# Altium PCB DIP2040.PcbDoc
Units mm, origin at the board's own origin, x right, y up, seen from the top; angles counter-clockwise.
Board outline 17.78 x 50.8 mm, 4 copper layers (Top Layer, Layer 1, Layer 2, Bottom Layer), stack 0.603 mm thick; 55 components, 62 nets, 253 pads, 64 vias.
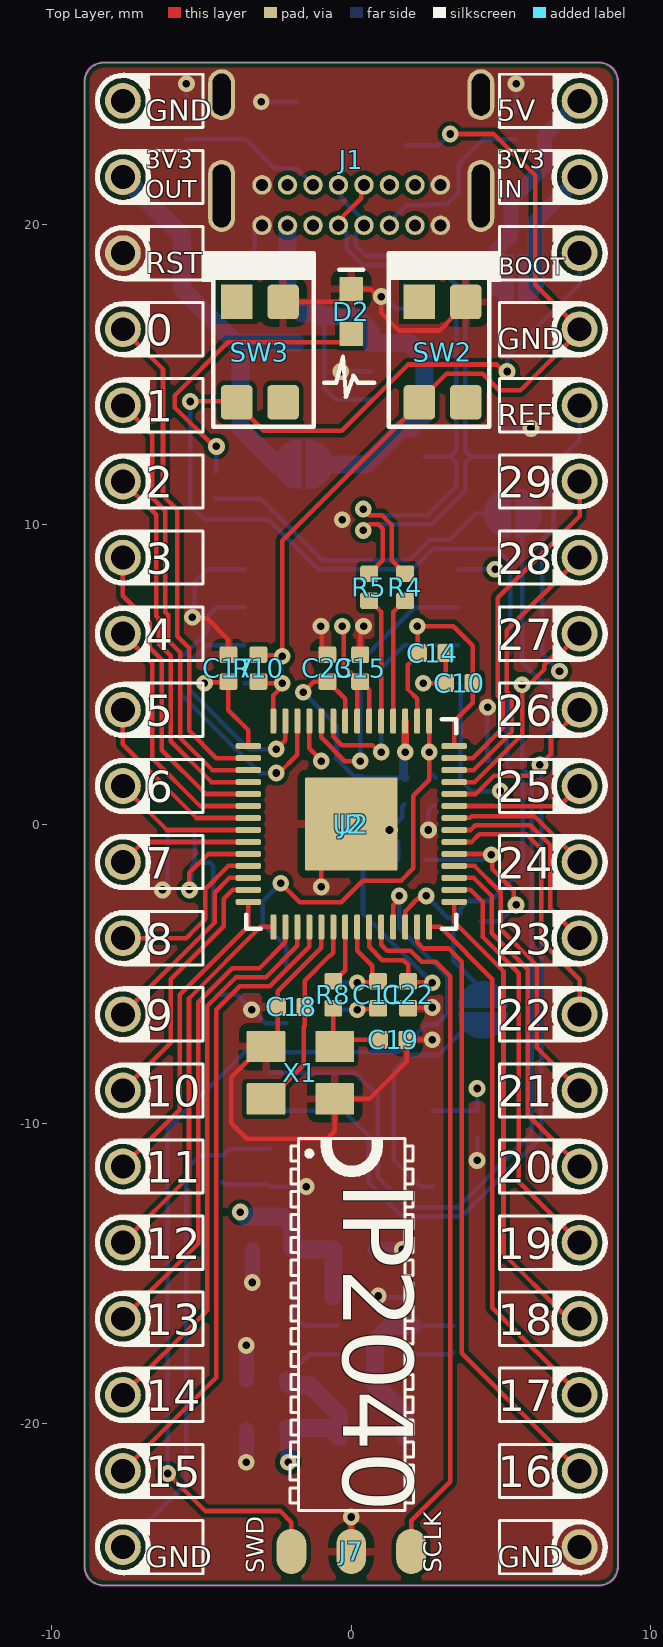
[diagram p0: Top Layer view]
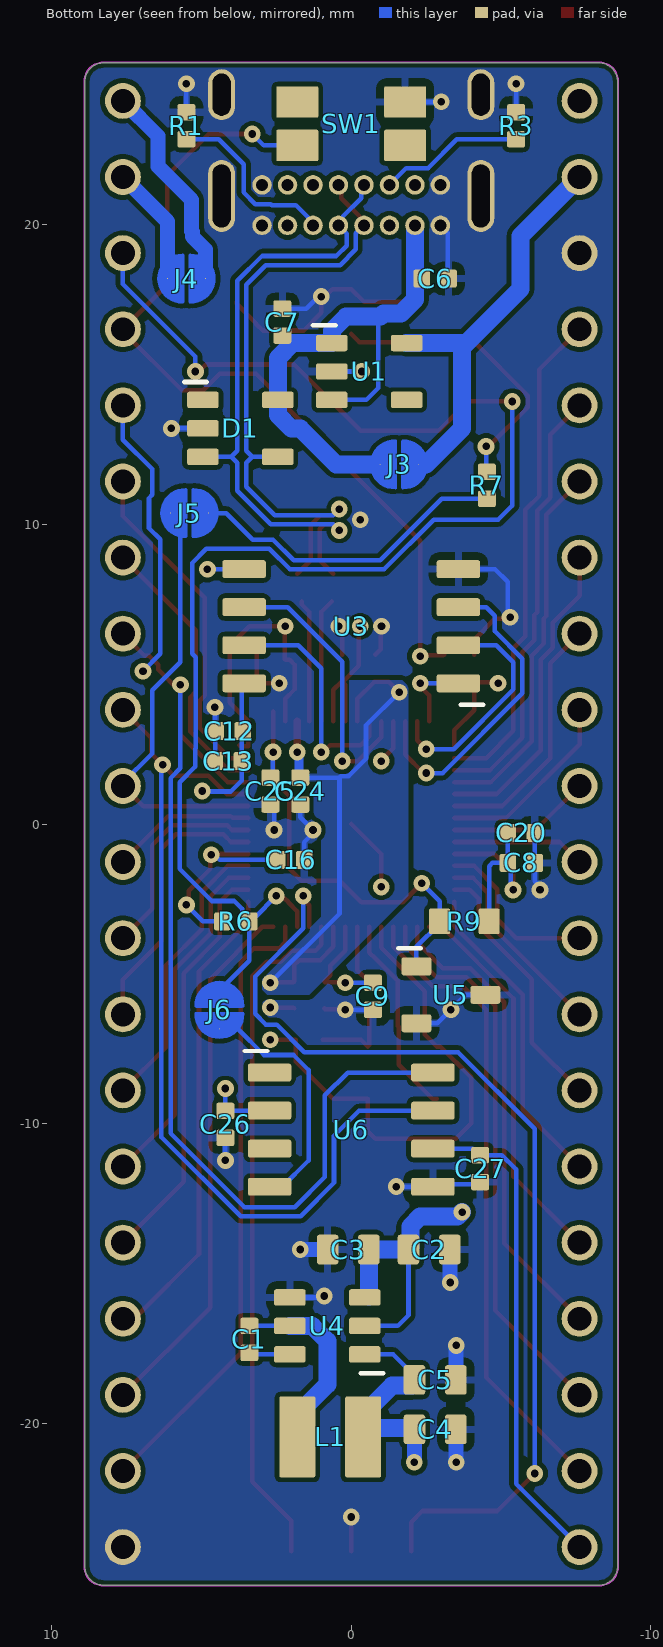
[diagram p1: Bottom Layer view, seen from below]
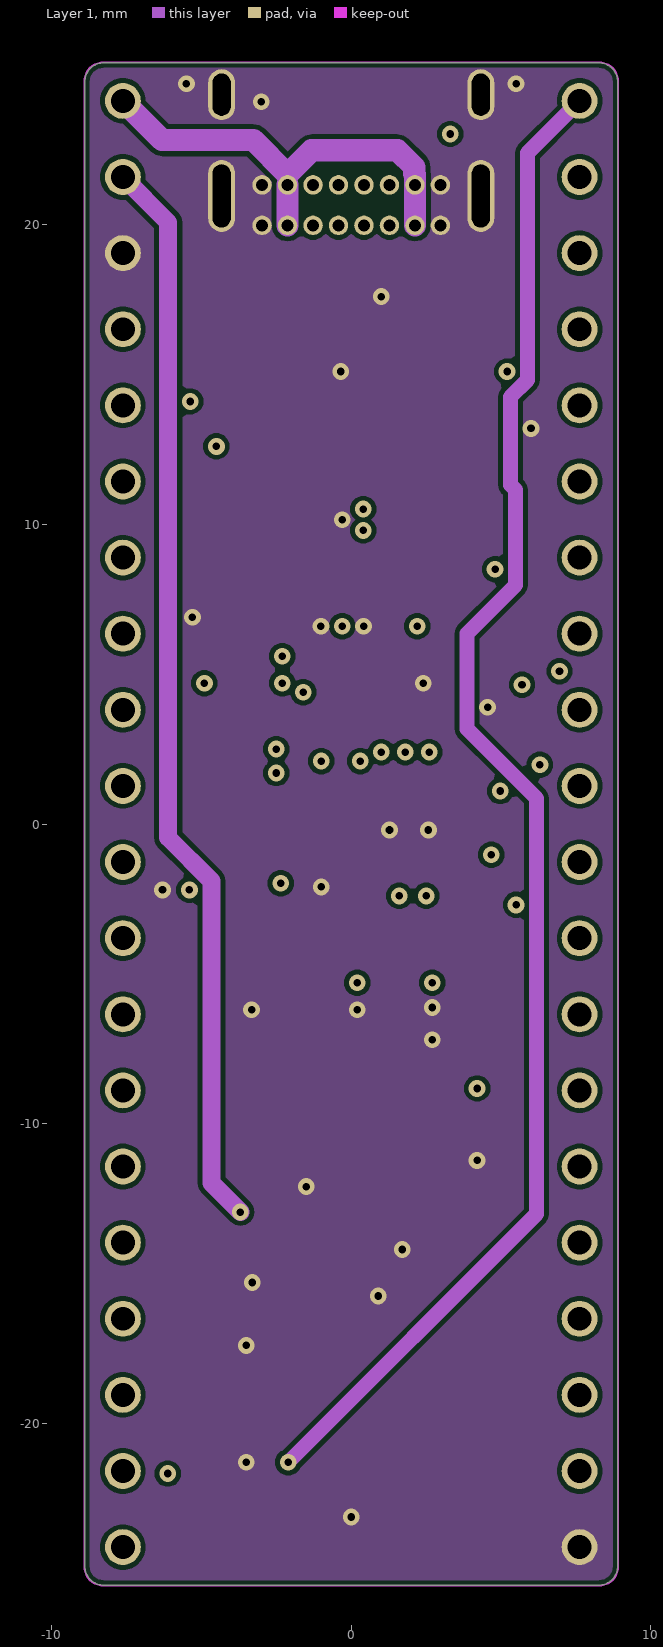
[diagram p2: Layer 1]
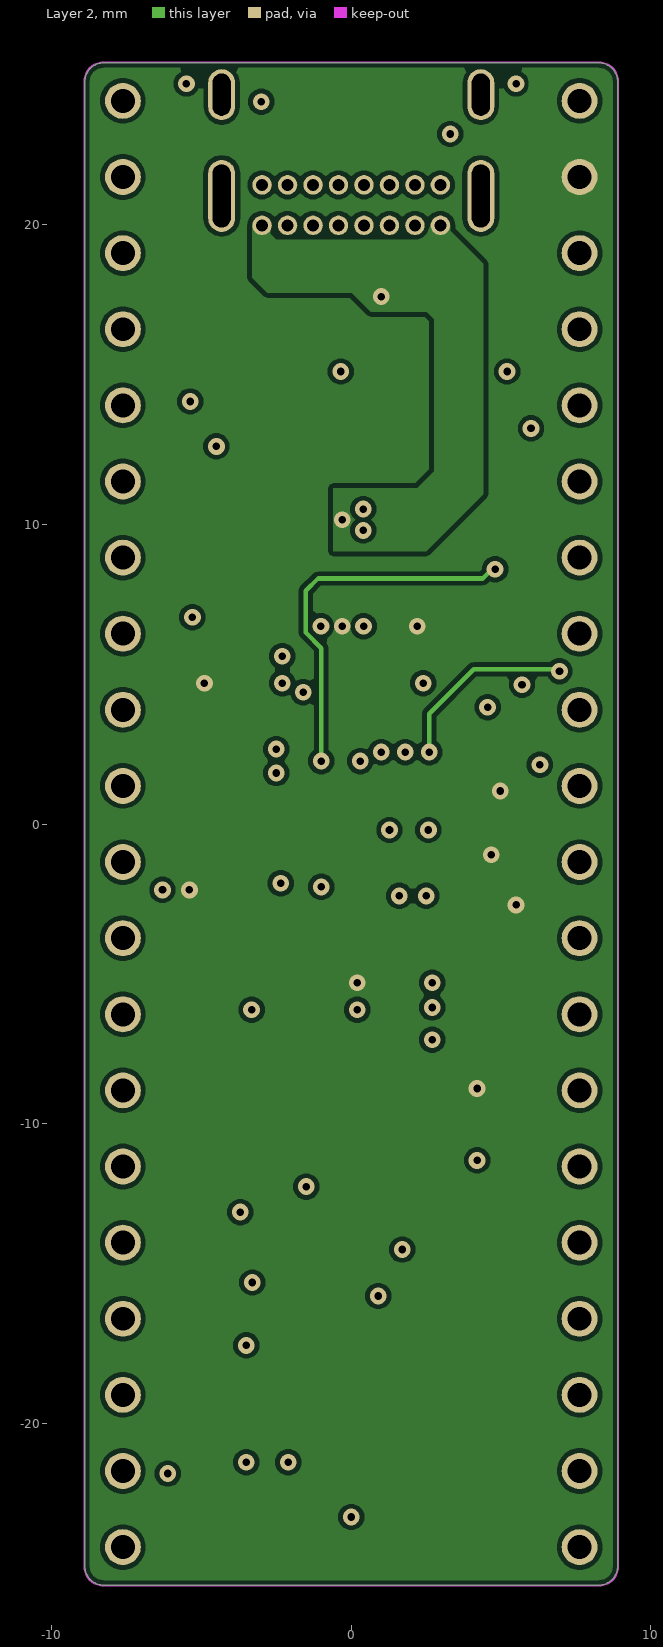
[diagram p3: Layer 2]
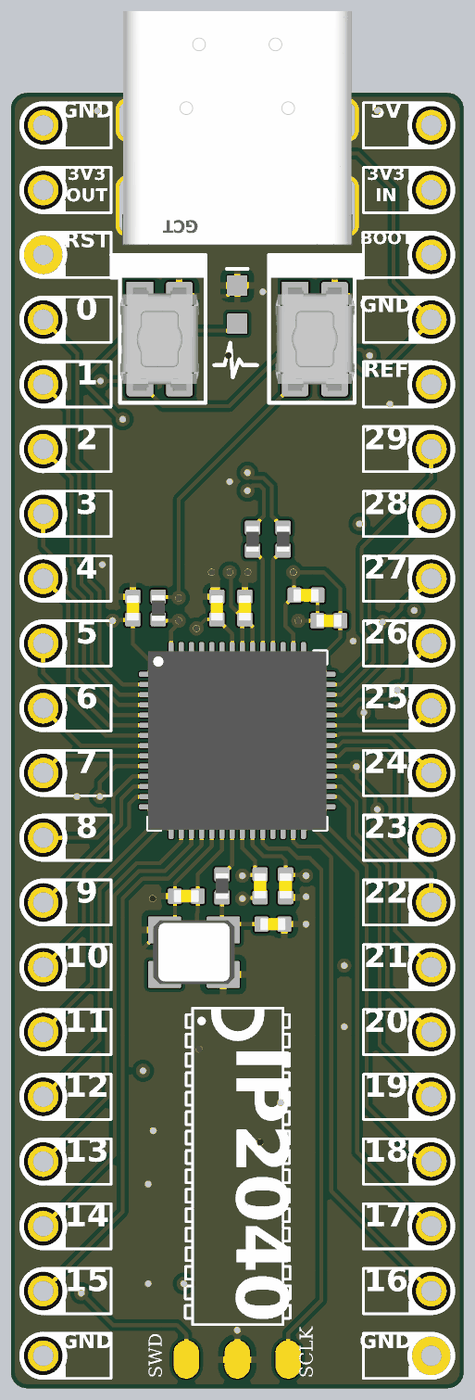
[diagram p4: 3D render of the assembled board from above, using the file's embedded part models]
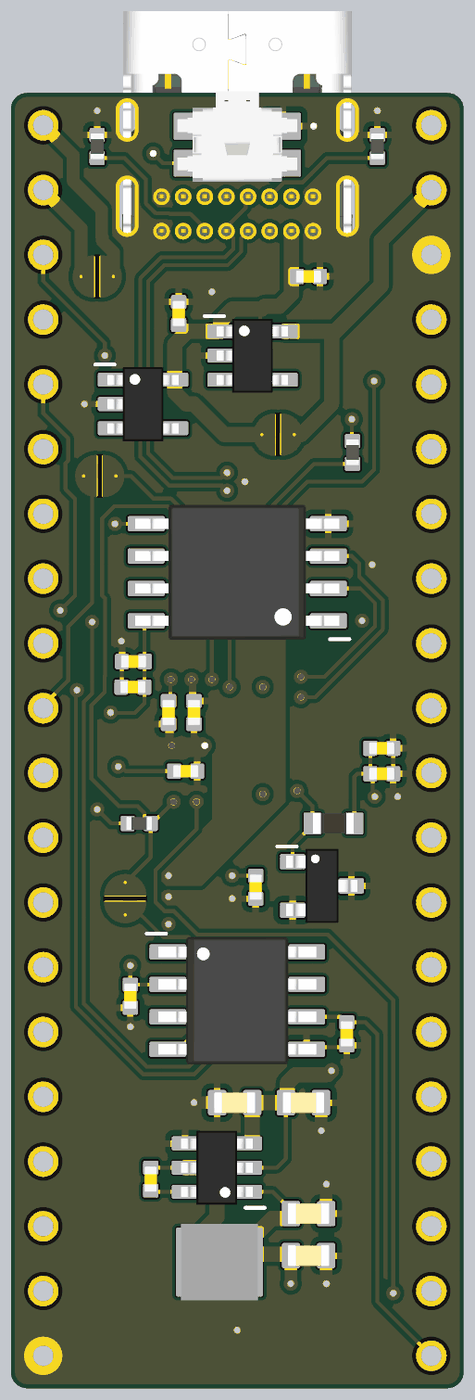
[diagram p5: 3D render of the assembled board from below, using the file's embedded part models]

## Layer stack, top to bottom
Top Solder: solder mask 0.0102, Solder Resist, Dk 3.5
Top Layer: signal copper 0.0356
Dielectric 2: prepreg 0.0711, PP-006, Dk 4.1
Layer 1: signal copper 0.035
Dielectric 1: dielectric 0.32, FR-4, Dk 4.8
Layer 2: signal copper 0.035
Dielectric 3: prepreg 0.0711, PP-006, Dk 4.1
Bottom Layer: signal copper 0.0356
Bottom Solder: solder mask 0.0102, Solder Resist, Dk 3.5

## Board outline
-8.89,-24.765 ccw(c-8.255,-24.765) -8.255,-25.4 8.255,-25.4 ccw(c8.255,-24.765) 8.89,-24.765 8.89,24.765 ccw(c8.255,24.765) 8.255,25.4 -8.255,25.4 ccw(c-8.255,24.765) -8.89,24.765

## Design rules (kind name [scope] priority, off if disabled: settings)
Clearance [All] p1: gap=0.152 ignorepadtopadclearanceinfootprint=FALSE
ComponentClearance [NOT InComponent('J2') vs NOT InComponent('J2')] p1: gap=0.254 collisioncheckmode=3 verticalgap=0.254 showdistances=FALSE
MinimumSolderMaskSliver [All] p1: minsoldermaskwidth=0.1
PolygonConnect [All] p1: thpad.connectstyle=Direct thpad.reliefconductorwidth=0.254 thpad.reliefentries=4 thpad.polygonreliefangle="90 Angle" thpad.airgapwidth=0.254 smdpad.connectstyle=Relief smdpad.reliefconductorwidth=0.254 smdpad.reliefentries=4 smdpad.polygonreliefangle="90 Angle" smdpad.airgapwidth=0.254 via.connectstyle=Direct via.reliefconductorwidth=0.254 via.reliefentries=4 via.polygonreliefangle="90 Angle" via.airgapwidth=0.254
RoutingVias [All] p1: holewidth=0.305 width=0.66 viastyle="Through Hole" minholewidth=0.254 minwidth=0.559 maxholewidth=2.54 maxwidth=3.81
SilkToSilkClearance [All] p1: silktosilkclearance=0.15
SilkToSolderMaskClearance [IsPad] p1: minsilkscreentomaskgap=0.05 clearancetoexposedcopper=TRUE
SolderMaskExpansion [All] p1: expansion=0.102 istentingtop=FALSE
SupplyNets "Schematic Supply Nets_7" [InNet('VBUS')] p1: voltage=0.000
SupplyNets "Schematic Supply Nets_6" [InNet('VSYS')] p2: voltage=0.000
SupplyNets "Schematic Supply Nets_5" [InNet('P3V3')] p3: voltage=0.000
SupplyNets "Schematic Supply Nets_3" [InNet('GND')] p4: voltage=0.000
SupplyNets "Schematic Supply Nets_2" [InNet('P3V3OUT')] p5: voltage=0.000
SupplyNets "Schematic Supply Nets_1" [InNet('VREF')] p6: voltage=0.000
Width [All] p1: maxlimit=1 minlimit=0.152 preferedwidth=0.152
26 further rules are at their usual default settings.

## Components (designator, comment, footprint, x,y, rotation, side; value= is the part's Value field where it differs from the comment)
C1 "CAP0402" CAPC0402 3.4,-17.2 r270 bottom
C2 "CAP0603" CAPC0603 -2.6,-14.2 r180 bottom
C3 "CAP0603" CAPC0603 0.1,-14.2 r0 bottom
C4 "CAP0603" CAPC0603 -2.8,-20.2 r180 bottom
C5 "CAP0603" CAPC0603 -2.8,-18.55 r180 bottom
C6 "CAP0402" CAPC0402 -2.8,18.2 r180 bottom
C7 "CAP0402" CAPC0402 2.3,16.75 r90 bottom
C8 "CAP0402" CAPC0402 -5.675,-1.3 r180 bottom
C9 "CAP0402" CAPC0402 -0.725,-5.75 r270 bottom
C10 "CAP0402" CAPC0402 3.6,4.7 r180 top
C11 "CAP0402" CAPC0402 0.9,-5.7 r270 top
C12 "CAP0402" CAPC0402 4.075,3.1 r0 bottom
C13 "CAP0402" CAPC0402 4.1,2.1 r0 bottom
C14 "CAP0402" CAPC0402 2.7,5.7 r0 top
C15 "CAP0402" CAPC0402 0.3,5.2 r90 top
C16 "CAP0402" CAPC0402 2.025,-1.2 r180 bottom
C17 "CAP0402" CAPC0402 -4.1,5.2 r90 top
C18 "CAP0603" CAPC0402 -2,-6.1 r180 top
C19 "CAP0603" CAPC0402 1.4,-7.2 r0 top
C20 "CAP0402" CAPC0402 -5.675,-0.3 r180 bottom
C22 "CAP0402" CAPC0402 1.9,-5.7 r270 top
C23 "CAP0402" CAPC0402 -0.8,5.2 r90 top
C24 "CAP0402" CAPC0402 1.7,1.1 r270 bottom
C25 "CAP0402" CAPC0402 2.7,1.1 r270 bottom
C26 "CAP0402" CAPC0402 4.2,-10.025 r270 bottom
C27 "CAP0402" CAPC0402 -4.3,-11.5 r270 bottom
D1 "TVS-WURTH-824011" SOT23-5 3.7,13.2 r180 bottom
D2 "BLUE" LED-0603-BLUE 0,17.1 r90 top
J1 "CONN-USBC-USB2-HOR" CONN-GCT-USB4085 0,24.003 r180 top locked
J2 "DIP40-SOCKET" CONN-DIP40-SOCKET 0,0 r0 top locked
J3 "SOLDERPAD-2" SOLDERPAD-2 -1.6,12 r0 bottom
J4 "SOLDERPAD-2" SOLDERPAD-2 5.5,18.2 r180 bottom
J5 "SOLDERPAD-2" SOLDERPAD-2 5.4,10.375 r0 bottom
J6 "SOLDERPAD-2" SOLDERPAD-2 4.4,-6.2 r270 bottom
J7 "CONN-TESTPAD-1.5X1-2MMP-3" CONN-TESTPAD-1.5X1-2MMP-3 0,-24.275 r180 top
L1 "4.7uH" IND-ABRACON-ASPI-3012S-3R9N-T 0.7,-20.45 r180 bottom value=4u7H
R1 "RESC0402" RESC0402 5.5,23.3 r90 bottom value=5K1
R3 "RESC0402" RESC0402 -5.5,23.3 r90 bottom value=5K1
R4 "RESC0402" RESC0402 1.8,7.9 r270 top value=27R
R5 "RESC0402" RESC0402 0.6,7.9 r270 top value=27R
R6 "RESC0402" RESC0402 3.85,-3.25 r0 bottom value=10K
R7 "RESC0402" RESC0402 -4.525,11.3 r90 bottom value=10K
R8 "RESC0402" RESC0402 -0.6,-5.7 r90 top value=1K
R9 "RESC0603" RES0603 -3.775,-3.25 r180 bottom value=100R
R10 "RESC0402" RESC0402 -3.1,5.2 r270 top value=1K
SW1 "SWITCH-E-SWITCH-TL1016" SWITCH-ESWITCH-TL1016 0,23.368 r0 bottom
SW2 "SWITCH-PANASONIC-EVP-AA202K" SWITCH-PANASONIC-EVP-AA202K 3.048,15.748 r270 top locked
SW3 "SWITCH-PANASONIC-EVP-AA202K" SWITCH-PANASONIC-EVP-AA202K -3.048,15.748 r270 top locked
U1 "XC8110" SOT23-5 -0.6,15.1 r180 bottom
U2 "RP2040" QFN40P700X700X90-56N-TH310X310 0,0 r0 top locked
U3 "W25Q128JVSIQ" SO127P790-8N 0,6.6 r0 bottom locked
U4 "AP63203Q" SOT23-6 0.8,-16.75 r0 bottom
U5 "LM4040-3.0" SOT23 -3.325,-5.7 r180 bottom
U6 "DS3231M" SO127P600-8N 0,-10.2 r180 bottom
X1 "ABM8-272-T3" XTAL-ABRACON-ABM8-272-T3 -1.7,-8.3 r90 top

## Footprints (in the part's own frame and the unit in brackets; to place one, negate y for a bottom-side part, rotate by r counter-clockwise, add the part's x,y. Pads: shape width x height; smd on the part's side, far side on the other; paste and mask are expansions set on the pad)
CAPC0402 [mm] "CAPACITOR, CHIP 0402 (1005) 0.5MM THICK"
  rrect25% 0.55x0.6 smd paste+0 mask+0.075: 1(-0.45,0) 2(0.45,0)
  body extent -0.51,-0.25 0.51,0.26, height 0.52
CAPC0603 [mm] "CAPACITOR, CHIP 0603 (1608) 0.5MM THICK"
  rrect25% 0.72x0.99 smd paste+0 mask+0.075: 1(-0.69,0) 2(0.69,0)
  body extent -0.81,-0.41 0.81,0.41, height 0.51
CONN-DIP40-SOCKET [mm]
  round 1.2 hole 0.8 paste-2539.97 mask+0.15: 1(-7.62,24.13) 2(-7.62,21.59) 3(-7.62,19.05) 4(-7.62,16.51) 5(-7.62,13.97) 6(-7.62,11.43) 7(-7.62,8.89) 8(-7.62,6.35) 9(-7.62,3.81) 10(-7.62,1.27) 11(-7.62,-1.27) 12(-7.62,-3.81) 13(-7.62,-6.35) 14(-7.62,-8.89) 15(-7.62,-11.43) 16(-7.62,-13.97) 17(-7.62,-16.51) 18(-7.62,-19.05) 19(-7.62,-21.59) 20(-7.62,-24.13) 21(7.62,-24.13) 22(7.62,-21.59) 23(7.62,-19.05) 24(7.62,-16.51) 25(7.62,-13.97) 26(7.62,-11.43) 27(7.62,-8.89) 28(7.62,-6.35) 29(7.62,-3.81) 30(7.62,-1.27) 31(7.62,1.27) 32(7.62,3.81) 33(7.62,6.35) 34(7.62,8.89) 35(7.62,11.43) 36(7.62,13.97) 37(7.62,16.51) 38(7.62,19.05) 39(7.62,21.59) 40(7.62,24.13)
CONN-GCT-USB4085 [mm]
  rrect100% 0.9x2.4 hole 2.1 slot 0.6 at 0 deg paste-2539.97 mask+0: 1(-4.325,3.045) 2(4.325,3.045)
  rrect100% 0.9x1.7 hole 1.4 slot 0.6 at 0 deg paste-2539.97 mask+0: 3(-4.325,-0.335) 4(4.325,-0.335)
  round 0.65 hole 0.4 paste-2539.97 mask+0: A1(-2.975,4.025) A4(-2.125,4.025) A5(-1.275,4.025) A6(-0.425,4.025) A7(0.425,4.025) A8(1.275,4.025) A9(2.125,4.025) A12(2.975,4.025) B1(2.975,2.675) B4(2.125,2.675) B5(1.275,2.675) B6(0.425,2.675) B7(-0.425,2.675) B8(-1.275,2.675) B9(-2.125,2.675) B12(-2.975,2.675)
  body extent -4.87,-4.83 4.87,4.83, height 0.25
CONN-TESTPAD-1.5X1-2MMP-3 [mm] "TESTPAD, 1.5 X 1 MM , 2MM PITCH , 3 PADS"
  oval 1x1.5 smd paste-2539.97 mask+0.05: 1(-2,0) 2(0,0) 3(2,0)
IND-ABRACON-ASPI-3012S-3R9N-T [mm]
  rrect8% 1.2x2.7 smd mask+0.05: 1(-1.1,0) 2(1.1,0)
  body extent -1.5,-1.5 1.5,1.5, height 1.51
LED-0603-BLUE [mm]
  rrect12% 0.8x0.8 smd paste+0 mask+0.05: 1(0.75,0) 2(-0.75,0)
  silkscreen extent 1.4,-0.4 1.4,0.4, body extent -0.8,-0.4 0.8,0.4, height 0.9
QFN40P700X700X90-56N-TH310X310 [mm]
  rrect50% 0.84x0.2 smd mask+0.05: 1(-3.435,2.6) 2(-3.435,2.2) 3(-3.435,1.8) 4(-3.435,1.4) 5(-3.435,1) 6(-3.435,0.6) 7(-3.435,0.2) 8(-3.435,-0.2) 9(-3.435,-0.6) 10(-3.435,-1) 11(-3.435,-1.4) 12(-3.435,-1.8) 13(-3.435,-2.2) 14(-3.435,-2.6) 29(3.435,-2.6) 30(3.435,-2.2) 31(3.435,-1.8) 32(3.435,-1.4) 33(3.435,-1) 34(3.435,-0.6) 35(3.435,-0.2) 36(3.435,0.2) 37(3.435,0.6) 38(3.435,1) 39(3.435,1.4) 40(3.435,1.8) 41(3.435,2.2) 42(3.435,2.6)
  rrect50% 0.2x0.84 smd mask+0.05: 15(-2.6,-3.435) 16(-2.2,-3.435) 17(-1.8,-3.435) 18(-1.4,-3.435) 19(-1,-3.435) 20(-0.6,-3.435) 21(-0.2,-3.435) 22(0.2,-3.435) 23(0.6,-3.435) 24(1,-3.435) 25(1.4,-3.435) 26(1.8,-3.435) 27(2.2,-3.435) 28(2.6,-3.435) 43(2.6,3.435) 44(2.2,3.435) 45(1.8,3.435) 46(1.4,3.435) 47(1,3.435) 48(0.6,3.435) 49(0.2,3.435) 50(-0.2,3.435) 51(-0.6,3.435) 52(-1,3.435) 53(-1.4,3.435) 54(-1.8,3.435) 55(-2.2,3.435) 56(-2.6,3.435)
  rrect3% 3.1x3.1 smd paste-0.57 mask+0.05: 57(0,0)
  silkscreen extent -3.5,-3.5 3.5,3.5, body extent -3.5,-3.5 3.5,3.5, height 0.9
RES0603 [mm] "Chip Resistor, 2-Leads, Body 1.60x0.80mm, IPC Medium Density"
  rrect14% 0.7x0.85 smd mask+0.05: 1(-0.825,0) 2(0.825,0)
  body extent -0.8,-0.4 0.8,0.4, height 0.45
RESC0402 [mm] "RESISTOR, CHIP 0402 (1005)"
  rrect25% 0.55x0.6 smd paste+0 mask+0.075: 1(-0.45,0) 2(0.45,0)
  body extent -0.5,-0.25 0.5,0.25, height 0.27
SO127P600-8N [mm] "SO8"
  rrect25% 1.45x0.6 smd mask+0.075: 1(-2.725,1.905) 2(-2.725,0.635) 3(-2.725,-0.635) 4(-2.725,-1.905) 5(2.725,-1.905) 6(2.725,-0.635) 7(2.725,0.635) 8(2.725,1.905)
  silkscreen extent -3.55,2.63 -2.8,2.63, body extent -3.1,-2.5 3.1,2.5, height 1.75
SO127P790-8N [mm] "SO8"
  rrect25% 1.45x0.6 smd mask+0.075: 1(-3.575,1.905) 2(-3.575,0.635) 3(-3.575,-0.635) 4(-3.575,-1.905) 5(3.575,-1.905) 6(3.575,-0.635) 7(3.575,0.635) 8(3.575,1.905)
  silkscreen extent -4.4,2.63 -3.65,2.63, body extent -4,-2.65 4,2.65, height 2.16
SOLDERPAD-2 [mil]
  round 1 smd paste-99999 mask+2: 1(-25,0) 2(25,0)
  Top Layer region: 38.09,0 35.6,-12.5 28.52,-23.11 17.91,-30.19 5.41,-32.68 5.41,-32.68 4.49,-32.49 3.71,-31.97 3.18,-31.19 3,-30.27 3,-30.27 3,30.27 3.18,31.19 3.71,31.97 4.49,32.49 5.41,32.68 5.41,32.68 17.91,30.19 28.52,23.11 35.6,12.51 38.09,0
  Top Layer region: -38.09,0 -35.6,-12.51 -28.52,-23.11 -17.91,-30.19 -5.41,-32.68 -5.41,-32.68 -4.49,-32.49 -3.71,-31.97 -3.18,-31.19 -3,-30.27 -3,-30.27 -3,30.27 -3.18,31.19 -3.71,31.97 -4.49,32.49 -5.41,32.68 -5.41,32.68 -17.91,30.19 -28.52,23.11 -35.6,12.5 -38.09,0
SOT23 [mm] "SOT23 PACKAGE, 3 PIN"
  rrect25% 1x0.6 smd paste+0 mask+0.075: 1(-1.15,0.95) 2(-1.15,-0.95) 3(1.15,0)
  silkscreen extent -1.75,1.55 -1,1.55, body extent -1.4,-1.45 1.4,1.45, height 1.3
SOT23-5 [mm] "SOT23 PACKAGE, 5 PIN (SOT25)"
  rrect25% 1.05x0.55 smd paste+0 mask+0.075: 1(-1.25,0.95) 2(-1.25,0) 3(-1.25,-0.95) 4(1.25,-0.95) 5(1.25,0.95)
  silkscreen extent -1.88,1.55 -1.12,1.55, body extent -1.4,-1.46 1.4,1.44, height 1.45
SOT23-6 [mm] "SOT23 PACKAGE, 6 PIN (SOT26)"
  rrect25% 1.05x0.55 smd paste+0 mask+0.05: 1(-1.25,0.95) 2(-1.25,0) 3(-1.25,-0.95) 4(1.25,-0.95) 5(1.25,0) 6(1.25,0.95)
  silkscreen extent -1.88,1.57 -1.13,1.58, body extent -1.4,-1.45 1.4,1.45, height 1.45
SWITCH-ESWITCH-TL1016 [mm]
  rrect9% 1.4x1.05 smd paste+0 mask+0.05: 1(-1.8,0.725) 2(1.8,0.725) 3(-1.8,-0.725) 4(1.8,-0.725)
  body extent -2.35,-2.1 2.35,1.45, height 1.36
SWITCH-PANASONIC-EVP-AA202K [mm] "SWITCH-PANASONIC-EVP-AA202K"
  rect 1.15x1.05 smd mask+0.075: 1(-1.675,-0.775)
  rrect25% 1.15x1.05 smd mask+0.075: 2(1.675,-0.775) 3(1.675,0.775) 4(-1.675,0.775)
  body extent -2.15,-1.55 2.15,1.55, height 1.71
XTAL-ABRACON-ABM8-272-T3 [mm] "ABM8-272-T3"
  rrect9% 1.05x1.3 smd mask+0.05: 1(-0.875,1.15) 2(-0.875,-1.15) 3(0.875,-1.15) 4(0.875,1.15)
  body extent -1.25,-1.6 1.25,1.6, height 0.7

## Part data
C1 C7 C10 C11 C13 C14 C15 C16 C17 C20 C22 C23 C26 C27: library part CAPC-0402-100nF-16V-X7R, "CAPACITOR,CERAMIC,100nF,16V,X7R,0402", Capacitance=100nF, Dielectric=X7R, LCSC=C60474, Package / Case=0402, Supplier Part Number 1=1292-1630-1-ND, Voltage=16V, Supplier 1=Digikey
C2 C3 C4 C5: library part CAPC-0603-22uF-16V-X5R, "CAPACITOR,CERAMIC,22uF,16V,X5R,0603", Capacitance=22uF, Dielectric=X5R, LCSC=C2762594, Package / Case=0603, Supplier Part Number 1=1276-7076-1-ND, Voltage=16V, Supplier 1=Digikey
C6 C8 C9 C12 C24 C25: library part CAPC-0402-4u7-10V-X5R, "CAPACITOR,CERAMIC,4u7,10V,X5R,0402", Capacitance=4u7, Dielectric=X5R, LCSC=C1705, Package / Case=0603, Supplier Part Number 1=1276-1482-1-ND, Voltage=10V, Supplier 1=Digikey
C18 C19: library part CAPC-0402-15PF-50V-C0G, "CAPACITOR,CERAMIC,15pF,50V,C0G,0402", Capacitance=15pF, Dielectric=C0G, LCSC=C3906764, Package / Case=0402, Supplier Part Number 1=311-3780-1-ND, Voltage=50V, Supplier 1=Digikey
D1: "DIODE,TVS,DUAL,UNIDIRECTIONAL,USB", LCSC=C22358704, Supplier Part Number 1=732-4465-1-ND, Supplier 1=Digikey
D2: library part LED-WURTH-150060BS75000, "LED,BLUE,0603", LCSC=C965807, Supplier Part Number 1=732-4966-1-ND, Supplier 1=Digikey
J1: "USB-C, RIGHT ANGLE"
L1: library part IND-TAIYO-NRH3012T4R7MN, "IND,4.7uH,1.06A,3X3, NRH3012T4R7MN", LCSC="C5159666, C42429096", Supplier Part Number 1=587-2591-1-ND, Supplier 1=Digikey
R1 R3: library part RESC-0402-5K1-1%-1/10W, "RESISTOR,5K1,1%,63mW,0402 (1005)", LCSC=C105872, Power=1/16W, Supplier Part Number 1=6053649, Tolerance=1%, Supplier 1="Future Electronics"
R4 R5: library part RESC-0402-27R-1%-1/10W, "RESISTOR,27R,1%,63mW,0402 (1005)", LCSC=C138021, Power=1/16W, Supplier Part Number 1=2577120, Tolerance=1%, Supplier 1="Future Electronics"
R6 R7: library part RESC-0402-10K-1%-1/10W, "RESISTOR,10K,1%,63mW,0402 (1005)", LCSC=C60490, Power=1/16W, Supplier Part Number 1=3388022, Tolerance=1%, Supplier 1="Future Electronics"
R8 R10: library part RESC-0402-1K-1%-1/10W, "RESISTOR,1K,1%,63mW,0402 (1005)", LCSC=C106235, Power=1/16W, Supplier Part Number 1=7825607, Tolerance=1%, Supplier 1="Future Electronics"
R9: library part RESC-0603-100R-1%-1/10W, "RESISTOR,100R,1%,100mW,0603 (1608)", Power=1/10W, Tolerance=1%
U1: library part IC-TOREX-XC8110, "IC,PMIC,IDEAL DIODE ORING CONTROLLER", Parameter 1=TOREX
U2: library part IC-RPI-RP2040-DIP40
U3: library part IC-WINBOND-W25Q128JVSIQ, "IC,FLASH,QSPI,16Mx8", LCSC=C97521, Supplier Part Number 1=W25Q128JVSIQCT-ND, Supplier 1=Digikey
U4: library part IC-DIODES-AP63203Q, "IC,PMIC,STEP-DOWN, 2A 3.3V", LCSC=C780769, Supplier Part Number 1=31-AP63203QWU-7CT-ND, Supplier 1=Digikey
U5: library part IC-TI-LM4040-3, "IC,VOLTAGE REFERENCE,3.0V", LCSC=C460608, Supplier Part Number 1=926-LM4040AIM330NOPB, Supplier 1=Mouser
U6: library part IC-ANALOG-DS3231M, "IC,RTC,I2C,DS3231M", LCSC=C107410, Supplier Part Number 1=700-DS3231MZ+TRL, Supplier 1=Mouser
X1: library part XTAL-ABRACON-ABM8-272-T3, "XTAL,12MHZ,RP2350", LCSC=C20625731, Supplier Part Number 1=815-ABM8-272-T3, Supplier 1=Mouser

## Via types
v1: diameter 0.559, hole 0.254, Top Layer to Bottom Layer, tented both sides, 64 vias

## Nets (pads, with @x,y where several pads share a name; then routed paths per layer and width w, separated by ;. In a path a pad name is that pad's centre, name@x,y a point inside that pad or via, vN(x,y) a via of type N, cw(c..) or ccw(c..) an arc to the next point about the centre after c; other vN are vias at no path point)
BOOT: J2.37 R10.1 SW1.2 SW2.2 | length 28.9
  Top Layer w0.152: R10.1 -3.075,5.625 -2.325,5.625 v1(-2.3,5.6) -2.3,9.45 2.273,14.023 SW2.2 2.273,14.123 3.179,15.029 4.383,15.029 4.94,14.472 5.647,14.472 7.62,16.445 J2.37 6.135,17.995 6.135,21.64 4.75,23.025 v1(3.3,23.025)
  Bottom Layer w0.152: SW1.2 2.918,22.643 v1(3.3,23.025)
DVDD: C22.1 C23.1 C24.1 U2.23 U2.45 U2.50 | length 21
  Top Layer w0.152: v1(-1.6,4.4) -1.25,4.75 C23.1 ; C23.1@-0.775,4.75 -0.2,4.175 U2.50 ; U2.23 0.6,-4.1 1.041,-4.541 1.741,-4.541 1.9,-4.7 C22.1 1.925,-5.275 2.675,-5.275 v1(2.7,-5.3)
  Top Layer w0.25: v1(1.8,2.4) U2.45
  Bottom Layer w0.152: v1(-1.6,4.4) -0.492,3.292 -0.492,2.174 0.09,1.592 0.35,1.592 0.392,1.55 C24.1@1.8,1.55 ; 0.392,1.5 0.392,-2.992 v1(2.7,-5.3)
  Bottom Layer w0.3: C24.1@1.8,1.55 1.75,1.6 1.75,2.35 v1(1.8,2.4)
GND: C2.2 C3.2 C4.2 C5.2 C6.2 C7.2 C8.2 C9.2 C10.2 C11.2 C12.2 C13.2 C14.2 C15.2 C16.2 C17.2 C18.2 C19.2 C20.2 C22.2 C23.2 C24.2 C25.2 C26.2 C27.2 D1.2 D2.1 J1.1 J1.2 J1.3 J1.4 J1.A1 J1.A12 J1.B1 J1.B12 J2.3 J2.21 J7.2 R1.2 R3.2 SW1.3 SW2.4 SW3.4 U1.2 U2.19 U2.57 U3.4 U4.4 U5.2 U5.3 U6.5 X1.2 X1.4 | length 67.1
  Top Layer w0.152: v1(-5.3,6.9) -5.246,6.846 -4.792,6.846 -4.1,6.154 C17.2 ; SW3.4 -0.427,17.423 D2.1 0.64,17.85 0.89,17.6 v1(1,17.6) 1,17.057 1.59,16.467 2.956,16.467 3.182,16.693 3.182,16.718 3.823,17.359 SW2.4 ; v1(-1.011,6.6) -0.983,6.572 -0.983,5.833 C23.2 ; U2.19 -1,-4.131 -2.45,-5.581 C18.2 -2.45,-7.025 X1.4 -2.975,-7.425 -4,-8.45 -4,-9.985 -3.485,-10.5 -0.8,-10.5 -0.55,-10.25 X1.2 0.6,-9.175 1.85,-7.925 C19.2 v1(2.7,-7.2) ; v1(-1,-2.1) -1,-1 U2.57 ; J7.2 v1(0,-23.125) ; v1(0.2,-6.2) 0.225,-6.175 0.875,-6.175 C11.2 ; C15.2 0.3,6.511 0.389,6.6 v1(0.411,6.6) ; C22.2 1.913,-6.137 2.688,-6.137 v1(2.7,-6.125) ; v1(2.4,4.7) C10.2 C14.2
  Bottom Layer w0.152: v1(-6.3,-2.2) -6.3,-2.09 -6.125,-1.915 C8.2 C20.2 ; R3.2 v1(-5.5,24.7) ; v1(-5.3,6.9) -5.222,6.978 -5.222,8.078 -4.797,8.503 U3.4@-3.569,8.503 ; U5.3 -3.825,-5.7 v1(-3.325,-6.2) -2.875,-6.65 U5.2 ; C27.2 -4.222,-12.027 -2.802,-12.027 U6.5 -1.505,-12.105 v1(-1.5,-12.1) ; C6.2 -3.225,18.225 -3.225,19.728 J1.A12 ; v1(-3,24.1) -2.993,24.093 SW1.3 ; C9.2 v1(0.2,-6.2) ; v1(-0.35,15.1) U1.2 ; v1(0.9,-15.75) 0.95,-15.8 U4.4 ; v1(1,17.6) 1.1,17.6 1.5,17.2 C7.2 ; C16.2 1.575,-0.61 1.275,-0.31 v1(1.275,-0.2) 1.7,0.225 1.7,0.575 C24.2@1.775,0.65 ; v1(2.575,-0.2) 2.575,0.451 2.774,0.65 C25.2@2.8,0.65 ; v1(4.2,-11.225) C26.2 ; C12.2 4.537,3.087 4.537,2.112 C13.2 C13.2@4.625,2.175 ; C12.2@4.55,3.1 4.537,3.112 4.537,3.887 v1(4.55,3.9) ; D1.2 v1(6,13.2) ; R1.2 v1(5.5,24.7)
  Bottom Layer w0.5: v1(-3.5,-21.3) -3.495,-21.295 -3.495,-20.205 C4.2 ; v1(-3.5,-17.4) -3.495,-17.405 -3.495,-18.545 C5.2 ; v1(-3.3,-15.3) -3.295,-15.295 -3.295,-14.205 C2.2 ; C3.2 v1(1.7,-14.2)
  other v1: -0.3,10.153
GP0: J2.4 U2.2 | length 16.7
  Top Layer w0.152: J2.4 -6.281,15.171 -6.281,10.957 -5.808,10.484 -5.808,6.262 -5.408,5.862 -5.408,3.108 -4.5,2.2 U2.2
GP1: J2.5 U2.3 | length 14.6
  Top Layer w0.152: J2.5 -6.639,12.989 -6.639,10.884 -6.205,10.45 -6.205,7.066 -6.113,6.974 -6.113,6.136 -5.713,5.736 -5.713,2.882 -4.631,1.8 U2.3
GP2: J2.6 U2.4 | length 12.5
  Top Layer w0.152: J2.6 -6.51,10.32 -6.51,6.94 -6.418,6.848 -6.418,6.01 -6.018,5.61 -6.018,2.755 -4.662,1.4 U2.4
GP3: J2.7 U2.5 | length 10.5
  Top Layer w0.152: J2.7 -7.62,7.619 -6.722,6.722 -6.722,5.883 -6.322,5.483 -6.322,2.462 -4.86,1 U2.5
GP4: J2.8 U2.6 | length 8.4
  Top Layer w0.152: J2.8 -6.639,5.369 -6.639,2.194 -5.045,0.6 U2.6
GP5: J2.9 U2.7 | length 6.5
  Top Layer w0.152: J2.9@-7.497,3.81 J2.9 -7.62,2.657 -5.163,0.2 U2.7
GP6: J2.10 U2.8 | length 4.8
  Top Layer w0.152: J2.10 -6.15,-0.2 U2.8
GP7: J2.11 U2.9 | length 4.5
  Top Layer w0.152: J2.11 -6.95,-0.6 U2.9
GP8: J2.12 U2.11 | length 5.8
  Top Layer w0.152: J2.12 -5.511,-3.81 -5.196,-3.495 ; -5.195,-3.495 -4.875,-3.175 -4.875,-2.175 -4.1,-1.4 U2.11
GP9: J2.13 U2.12 | length 6.7
  Top Layer w0.152: J2.13 -4.555,-3.286 -4.555,-2.29 -4.065,-1.8 U2.12
GP10: J2.14 U2.13 | length 8.7
  Top Layer w0.152: J2.14 -6.024,-7.294 -6.024,-5.186 -4.25,-3.412 -4.25,-2.5 -3.95,-2.2 U2.13
GP11: J2.15 U2.14 | length 10.6
  Top Layer w0.152: J2.15 -5.719,-9.529 -5.719,-5.695 -3.435,-3.411 U2.14
GP12: J2.16 U2.15 | length 12.9
  Top Layer w0.152: J2.16 -5.414,-11.764 -5.414,-5.821 -3.028,-3.435 U2.15
GP13: J2.17 U2.16 | length 15.9
  Top Layer w0.152: J2.17 -5.11,-14 -5.11,-6.824 -5.11,-5.947 -3.972,-4.809 -3.095,-4.809 -3.059,-4.809 -2.2,-3.95 U2.16
GP14: J2.18 U2.17 | length 18.6
  Top Layer w0.152: J2.18 -4.805,-16.235 -4.805,-6.95 -4.805,-6.074 -3.845,-5.114 -2.969,-5.114 -2.845,-5.114 -1.8,-4.069 U2.17
GP15: J2.19 U2.18 | length 21.3
  Top Layer w0.152: J2.19 -4.5,-18.47 -4.5,-6.2 -3.719,-5.419 -2.719,-5.419 -1.4,-4.1 U2.18
GP16: J2.22 U2.27 | length 20.9
  Top Layer w0.152: U2.27 2.2,-3.95 2.405,-4.155 3.255,-4.155 3.692,-4.592 3.692,-17.662 J2.22
GP17: J2.23 U2.28 | length 17.9
  Top Layer w0.152: U2.28 2.966,-3.435 4.708,-5.177 4.708,-16.138 J2.23
GP18: J2.24 U2.29 | length 15.9
  Top Layer w0.152: U2.29 3.435,-3.271 5.08,-4.916 5.08,-14.351 7.039,-16.31 7.42,-16.31 J2.24
GP19: J2.25 U2.30 | length 13.8
  Top Layer w0.152: U2.30 3.978,-2.2 4.382,-2.604 4.382,-3.771 5.588,-4.976 5.588,-11.938 J2.25
GP20: J2.26 U2.31 | length 11.7
  Top Layer w0.152: U2.31 4.084,-1.8 4.687,-2.404 4.687,-3.644 5.893,-4.85 5.893,-9.703 J2.26
GP21: J2.27 U2.32 | length 9.6
  Top Layer w0.152: U2.32 4.115,-1.4 4.992,-2.277 4.992,-3.518 6.198,-4.724 6.198,-7.468 J2.27
GP22: J2.28 U2.34 | length 9.3
  Top Layer w0.152: U2.34 4.012,-0.6 4.268,-0.344 5.85,-0.344 6.334,-0.828 6.334,-3.912 7.62,-5.197 J2.28
GP23: J2.29 U2.35 | length 7.1
  Top Layer w0.152: U2.35 3.981,-0.2 4.142,-0.039 5.976,-0.039 6.639,-0.702 6.639,-2.829 J2.29
GP24: J2.30 U2.36 | length 4.9
  Top Layer w0.152: U2.36 3.449,0.214 3.964,0.214 4.015,0.265 6.103,0.265 7.62,-1.252 J2.30
GP25: J2.31 J5.2 U2.37 | length 14.5
  Top Layer w0.152: U2.37 4.757,0.6 4.765,0.592 6.942,0.592 J2.31
  Bottom Layer w0.152: J5.2 5.705,10.045 5.705,7.725 5.7,7.72 5.7,5.4 6.639,4.461 6.639,2.352 7.62,1.371 J2.31
GP26: J2.32 U2.38 U6.7 | length 30.6
  Top Layer w0.152: U2.38 4.157,1 4.765,1.608 5.926,1.608 v1(6.296,1.977) 6.665,2.347 6.665,2.855 J2.32
  Bottom Layer w0.152: U6.7 -0.26,-9.565 0.575,-10.4 0.575,-11.975 1.691,-13.091 3.69,-13.091 6.335,-10.446 6.335,1.938 v1(6.296,1.977)
GP27: J2.33 U2.39 U6.8 | length 35.7
  Top Layer w0.152: U2.39 4.117,1.4 5.7,2.983 v1@5.7,4.414 ; v1(5.7,4.65) v1@5.7,4.414 ; J2.33 7.62,6.334 6.894,5.608 6.74,5.608 6.442,5.31 6.442,5.156 v1@5.7,4.414
  Bottom Layer w0.152: U6.8 0.12,-8.295 0.88,-9.055 0.88,-11.78 1.886,-12.786 3.564,-12.786 6.03,-10.32 6.03,1.525 5.7,1.855 v1(5.7,4.65)
GP28: J2.34 U2.40 | length 9.3
  Top Layer w0.152: U2.40 4.086,1.8 5.363,3.077 5.363,4.237 5.192,4.407 5.192,6.462 J2.34
GP29: J2.35 U2.41 | length 11.5
  Top Layer w0.152: U2.41 4.055,2.2 5.058,3.203 5.058,4.11 4.887,4.281 4.887,7.545 7.62,10.277 J2.35
NetC1_1: C1.1 L1.1 U4.5 | length 6.4
  Bottom Layer w0.152: U4.5 C1.1
  Bottom Layer w0.6: L1.1 1.8,-19.7 0.8,-18.7 0.8,-17.25 1.3,-16.75 U4.5
NetC1_2: C1.2 U4.6 | length 1.4
  Bottom Layer w0.152: U4.6 3.35,-17.7 C1.2
NetC19_1: C19.1 R8.1 X1.3 | length 2.9
  Top Layer w0.152: R8.1 -0.6,-7.375 X1.3 -0.325,-7.2 C19.1
NetC27_1: C27.1 J2.20 U6.6 | length 16.5
  Bottom Layer w0.152: J2.20 -5.5,-22.01 -5.5,-11.525 -5.025,-11.05 C27.1 ; C27.1@-4.275,-11.05 -4.06,-10.835 U6.6
NetD1_3: D1.3 J1.A6 J1.B6 R5.1 | length 21.1
  Top Layer w0.152: v1(0.4,9.797) 0.4,9.8 0.6,10 0.9,10 1.048,9.852 1.048,8.798 R5.1
  Bottom Layer w0.152: J1.B6 -0.33,21.233 -0.33,20.881 0.281,20.27 0.281,20.257 0.425,20.113 J1.A6 0.15,19.703 0.15,19.3 0.495,18.955 2.976,18.955 3.805,18.126 3.805,12.45 4.005,12.25 ; v1(0.4,9.797) 0.603,10 2.681,10 3.805,11.124 3.805,12.05 4.005,12.25 ; D1.3@4.855,12.25 4.005,12.25
NetD1_4: D1.4 J1.A7 J1.B7 R4.1 | length 21.1
  Top Layer w0.152: J1.A7 -0.425,20.113 -0.281,20.257 -0.281,20.27 0.33,20.881 0.33,21.233 J1.B7 ; v1(0.4,10.508) 0.4,10.505 0.6,10.305 1.026,10.305 1.352,9.979 1.352,8.798 R4.1
  Bottom Layer w0.152: J1.A7 -0.155,19.708 -0.155,19.174 0.369,18.65 2.85,18.65 3.5,18 3.5,12.45 3.3,12.25 ; v1(0.4,10.508) 0.603,10.305 2.555,10.305 3.5,11.25 3.5,12.05 3.3,12.25 ; D1.4 3.3,12.25
NetD2_2: D2.2 R7.2 | length 9.9
  Top Layer w0.152: v1(-4.5,12.6) -4.593,12.6 -5.883,13.89 -5.883,14.31 -4.117,16.076 -0.274,16.076 D2.2
  Bottom Layer w0.152: R7.2 -4.5,11.775 v1(-4.5,12.6)
NetJ1_A5: J1.A5 R1.1 | length 6
  Bottom Layer w0.152: J1.A5 1.275,20.083 1.845,20.653 2.652,20.653 2.683,20.684 3.197,20.684 3.588,21.074 3.588,22.013 4.424,22.85 R1.1
NetJ1_B5: J1.B5 R3.1 | length 4.9
  Bottom Layer w0.152: R3.1 -3.526,22.85 -2.565,21.889 -1.836,21.889 J1.B5
NetJ5_1: J5.1 R7.1 | length 10.8
  Bottom Layer w0.152: R7.1 -3.019,10.85 -0.969,8.8 1.919,8.8 2.61,9.491 3.291,9.491 4.175,10.375 J5.1
NetJ6_2: J6.2 U6.4 | length 8.2
  Bottom Layer w0.152: U6.4 2.3,-12.105 1.425,-11.23 1.425,-8.208 1.925,-7.708 2.91,-7.708 3.783,-6.835 J6.2
NetR4_2: R4.2 U2.46 | length 4.1
  Top Layer w0.152: U2.46 1.4,7.075 1.651,7.326 R4.2@1.651,7.425
NetR5_2: R5.2 U2.47 | length 4.1
  Top Layer w0.152: R5.2@0.651,7.424 0.824,7.251 1,7.076 U2.47
P3V3: C8.1 C9.1 C10.1 C11.1 C12.1 C13.1 C14.1 C15.1 C16.1 C17.1 C20.1 C26.1 J2.39 J4.1 R6.2 R9.2 U2.1 U2.10 U2.22 U2.33 U2.42 U2.44 U2.48 U2.49 U3.8 U6.2 | length 46.7
  Top Layer w0.152: v1(-5.4,-2.2) -5.4,-1.625 -4.775,-1 U2.10 ; v1(-4.9,4.7) -4.875,4.725 -4.125,4.725 C17.1 -4.1,3.8 -3.435,3.135 U2.1 U2.1@-3.476,2.6 ; v1(-0.3,6.6) -0.25,6.55 -0.25,5.275 0.275,4.75 C15.1 0.2,4.65 U2.49 ; v1(0.2,-5.3) 0.225,-5.275 0.875,-5.275 C11.1 ; U2.22 0.2,-4.225 0.7,-4.725 0.7,-5.051 C11.1 ; C15.1@0.325,4.75 0.6,4.475 U2.48 ; U2.44 2.2,4.182 1.892,4.49 1.892,5.317 2.051,5.476 2.2,5.476 2.225,5.501 2.225,6.575 v1(2.2,6.6) 3.4,6.6 4.05,5.95 C10.1 4.05,4.05 3.435,3.435 U2.42 3.705,2.6 U2.42@3.729,2.624 ; U2.33 4.65,-1 4.7,-1.05 4.7,-1.5 5.422,-2.222 5.422,-2.622 v1(5.5,-2.7)
  Bottom Layer w0.152: v1(-5.4,-2.2) -5.322,-2.122 -5.322,-1.397 C8.1 ; C20.1 C8.1 ; R9.2 -4.6,-1.41 -4.71,-1.3 C8.1 ; C9.1 v1(0.2,-5.3) ; C16.1 4.39,-1.2 4.565,-1.025 v1(4.675,-1.025) ; U6.2 2.73,-9.57 4.195,-9.57 C26.1 v1(4.2,-8.825) ; U3.8 3.65,4.62 C13.1 3.65,1.45 4.016,1.084 4.959,1.084 v1(4.975,1.1) ; R6.2 4.95,-3.25 v1(5.5,-2.7)
  Bottom Layer w0.5: J4.1 6.135,20.105 J2.39
P3V3OUT: C4.1 C5.1 J2.40 J4.2 L1.2 U4.1 | length 66.5
  Layer 1 w0.5: v1(-2.1,-21.3) 6.182,-13.018 6.182,0.857 3.868,3.171 3.868,6.356 5.482,7.969 5.482,11.154 5.318,11.318 5.318,14.254 5.882,14.818 5.882,22.392 J2.40
  Bottom Layer w0.152: C5.1@-2.11,-18.415 -1.395,-17.7 U4.1
  Bottom Layer w0.5: C4.1 -2.105,-20.205 -2.105,-21.295 v1(-2.1,-21.3) ; J4.2 4.865,19.165 5.3,19.6 5.3,19.762 5.33,19.792 5.33,20.83 6.443,21.943 6.443,22.953 J2.40
  Bottom Layer w0.6: C4.1@-2.11,-20.15 -0.7,-20.15 L1.2 -0.4,-19.7 -1.355,-18.745 -2.05,-18.745 -2.11,-18.685 C5.1
QCLK: U2.52 U3.6 | length 9.5
  Top Layer w0.152: U2.52 -1,2.889 -0.211,2.1 v1(0.3,2.1)
  Bottom Layer w0.152: v1(0.3,2.1) 0.3,5.418 2.117,7.235 U3.6
QSD0: U2.53 U3.5 | length 15.2
  Top Layer w0.152: U2.53 -1.4,2.526 -1,2.126 v1(-1,2.1)
  Layer 2 w0.152: v1(-1,2.1) -1,5.87 -1.519,6.39 -1.519,7.781 -1.108,8.192 4.39,8.192 4.698,8.5 v1(4.8,8.5)
  Bottom Layer w0.152: U3.5 3.578,8.503 4.798,8.503 v1(4.8,8.5)
QSD1: U2.55 U3.2 | length 7.8
  Top Layer w0.152: v1(-2.5,2.5) -2.2,2.8 U2.55
  Bottom Layer w0.152: U3.2 -4.835,5.965 -5.408,5.392 -5.408,4.49 -3.418,2.5 v1(-2.5,2.5)
QSD2: U2.54 U3.3 | length 10.7
  Top Layer w0.152: v1(-2.5,1.7) -2.41,1.7 -1.8,2.31 U2.54
  Bottom Layer w0.152: U3.3 -4.505,7.235 -4.792,6.948 -4.792,6.439 -5.713,5.518 -5.713,4.363 -3.049,1.7 v1(-2.5,1.7)
QSD3: U2.51 U3.7 | length 8
  Top Layer w0.152: U2.51 -0.6,2.92 -0.314,2.634 0.232,2.634 0.708,2.634 0.942,2.4 v1(1,2.4)
  Bottom Layer w0.152: v1(1,2.4) 1,5.2 1.765,5.965 U3.7
QSS: R10.2 U2.56 U3.1 | length 3.5
  Top Layer w0.152: R10.2@-3.1,4.7 v1(-2.3,4.7) -2.3,4.59 -2.6,4.29 U2.56
  Bottom Layer w0.152: U3.1 -3.572,4.697 -2.303,4.697 v1(-2.3,4.7)
RST: J2.38 J6.1 R6.1 SW3.2 U2.26 | length 51.6
  Top Layer w0.152: v1(-5.375,14.1) -3.85,14.1 SW3.2 -3.823,14.023 -2.917,13.117 -0.312,13.117 1.905,15.334 4.856,15.334 5.09,15.1 v1(5.2,15.1) ; U2.26 1.8,-2.918 2.108,-2.61 2.108,-2.6 2.23,-2.478 2.478,-2.478 v1@2.5,-2.5
  Bottom Layer w0.152: v1(-5.375,14.1) -5.375,10.626 -4.899,10.15 -2.75,10.15 -1.095,8.495 2.045,8.495 2.736,9.186 4.832,9.186 5.308,8.71 5.308,5.679 5.192,5.563 5.192,2.532 5.206,2.518 5.206,1.918 5.725,1.399 5.725,-1.5 4.656,-2.569 3.907,-2.569 3.644,-2.832 3.644,-2.981 3.5,-3.125 R6.1@3.3,-3.125 ; v1(2.5,-2.4) 3.225,-3.125 R6.1@3.3,-3.125 ; J6.1 3.4,-4.565 3.4,-3.225 R6.1@3.3,-3.125 ; v1(5.2,15.1) 5.2,15.6 7.62,18.02 J2.38
SWCLK: J7.1 U2.24 | length 23.1
  Top Layer w0.152: U2.24 1,-4.031 1.205,-4.236 1.991,-4.236 2.355,-4.6 2.825,-4.6 3.3,-5.075 3.3,-21.95 2,-23.25 J7.1
SWD: J7.3 U2.25 | length 33.9
  Top Layer w0.152: v1(-6.125,-21.675) -4.875,-22.925 -2.375,-22.925 -2,-23.3 J7.3 ; U2.25 1.4,-2.71 1.6,-2.51 v1(1.6,-2.4)
  Bottom Layer w0.152: v1(-6.125,-21.675) -6.125,-10.175 -3.564,-7.614 1.568,-7.614 2.49,-6.692 2.851,-6.692 3.208,-6.335 3.208,-5.09 1.6,-3.482 v1(1.6,-2.4)
VBUS: C6.1 C7.1 D1.5 J1.A4 J1.A9 J1.B4 J1.B9 J2.1 J3.2 U1.1 U1.3 | length 32.5
  Layer 1 w0.745: J2.1 -6.313,22.823 -3.268,22.823 -2.125,21.68 -1.326,22.479 1.542,22.479 2.104,21.916 2.104,21.701 2.125,21.68 J1.B9 J1.A4 ; J1.A9 J1.B4
  Bottom Layer w0.152: -0.972,16.928 -0.9,16.856 -0.9,14.55 -0.5,14.15 U1.3
  Bottom Layer w0.6: J1.A9 -2.125,17.498 -1.656,17.03 -1.073,17.03 -0.972,16.928 0.181,16.928 0.65,16.46 0.65,16.375 ; J3.2 0.5,12 1.7,13.2 2,13.2 2.45,13.65 2.45,14.475 2.45,15.55 1.95,16.05 U1.1
VREF: C25.1 J2.36 R9.1 U2.43 U5.1 | length 30.8
  Top Layer w0.152: v1(-2.35,-1.975) -1.717,-2.608 -0.333,-2.608 0.383,-1.892 1.662,-1.892 2.075,-1.479 2.075,-0.525 2.067,-0.517 2.067,0.942 2.607,1.482 v1(2.607,2.4) 2.6,2.407 U2.43@2.6,3.755
  Layer 2 w0.152: v1(2.607,2.4) 2.607,3.682 4.083,5.158 6.892,5.158 v1(6.95,5.1)
  Bottom Layer w0.152: R9.1@-2.95,-3.325 -2.175,-4.1 U5.1 ; R9.1 -2.95,-2.575 v1(-2.35,-1.975) ; v1(2.607,2.4) 2.626,2.381 2.626,1.724 C25.1@2.8,1.55 ; v1(6.95,5.1) 6.375,5.675 6.375,9.5 6.748,9.873 6.748,10.877 6.639,10.986 6.639,11.846 7.62,12.827 J2.36
VSYS: C2.1 C3.1 J2.2 J3.1 U1.5 U4.2 U4.3 | length 59.6
  Layer 1 w0.6: J2.2 -6.107,20.077 -6.107,-0.458 -4.668,-1.897 -4.668,-11.982 v1(-3.7,-12.95)
  Bottom Layer w0.152: C2.1 -1.91,-16.39 -1.55,-16.75 U4.2
  Bottom Layer w0.6: J2.2 -5.65,19.62 -5.65,17.85 -3.85,16.05 ; v1(-3.7,-12.95) -3.55,-13.1 -2.3,-13.1 -1.97,-13.43 -1.97,-14.14 C2.1 C3.1 U4.3@-0.59,-15.775 ; J3.1 -2.5,12 -3.7,13.2 -3.7,15.9 -3.85,16.05 ; U1.5 -3.85,16.05
XIN: C18.1 U2.20 X1.1 | length 6.8
  Top Layer w0.152: X1.1 -2.725,-9.175 -1.581,-8.031 -1.581,-6.771 -1.55,-6.74 C18.1 -1.55,-5.226 -0.724,-4.4 -0.7,-4.4 -0.6,-4.3 U2.20
XOUT: R8.2 U2.21 | length 2
  Top Layer w0.152: R8.2 -0.575,-5.25 -0.2,-4.875 U2.21
pads on no net: D1.1 J1.A8 J1.B8 SW1.1 SW1.4 SW2.1 SW2.3 SW3.1 SW3.3 U1.4 U6.1 U6.3

## Polygon pours and split planes (outlines as drawn)
P3V3 on Layer 2 "GND_USB" (solid, remove dead copper, pour order 3): 9.125,-25.775 9.125,25.775 -9.3,25.775 -9.3,-25.775 8.6,-25.775
GND on Layer 2 "GND_USB" (solid, remove dead copper, pour order 2): -0.6,9.1 2.5,9.1 4.4,11 4.4,18.7 3.3,19.8 3.3,20 2.7,20 2.2,19.5 -2.5,19.5 -2.7,19.7 -2.7,20 -3.3,20 -3.3,18.227 -2.798,17.725 0.025,17.725 0.65,17.1 2.523,17.1 2.775,16.848 2.775,11.775 2.2,11.2 -0.6,11.2
GND on Bottom Layer "GND_L04_P005" (solid, remove dead copper, pour order 5): -9.2,-25.7 -9.2,25.8 9.4,25.8 9.4,-25.7 -3.9,-25.7
DVDD on Bottom Layer "DVDD_L04_P001" (solid, remove dead copper, pour order 1): -1.7,4.8 0.9,4.8 1,4.7 1,3 2.007,3 2.604,2.404 2.604,1.129 1,-0.475 1,-3.1 3,-5.1 3,-5.5 2.8,-5.7 1.4,-5.7 -1.9,-2.4 -1.9,4.6
GND on Top Layer "GND_L01_P004" (solid, remove dead copper, pour order 4): -9.2,-25.7 -9.2,25.8 9.4,25.8 9.4,-25.7 -3.9,-25.7
GND on Layer 1 "GND_L02_P000" (solid, remove dead copper, pour order 0): -9.2,-25.7 -9.2,25.8 9.4,25.8 9.4,-25.7 -3.9,-25.7

## Keep-outs
Keep-Out Layer:
  lines w0.05: -8.915,-24.765 ccw(c-8.255,-24.765) -8.255,-25.425 8.255,-25.425 ccw(c8.255,-24.765) 8.915,-24.765 8.915,24.765 ccw(c8.255,24.765) 8.255,25.425 -8.255,25.425 ccw(c-8.255,24.765) -8.915,24.765 -8.915,-24.765

## Silkscreen, mask and mechanical layers (free items; w line width, h text height)
Top Overlay:
  drawing of 363 lines, arcs and shapes, not listed
  text "GND" at -6.858,23.241 h1.2
  text "5V" at 4.876,23.23 h1.2
  text "3V3 / OUT" at -6.858,20.69 h1
  text "3V3 / IN" at 4.892,20.69 h1
  text "RST" at -6.858,18.15 h1.2
  text "BOOT" at 4.92,18.15 h0.95
  text "0" at -6.858,15.61 h1.8
  text "GND" at 4.892,15.61 h1.2
  text "1" at -6.858,13.07 h1.8
  text "REF" at 4.892,13.07 h1.2
  text "2" at -6.858,10.53 h1.8
  text "29" at 4.892,10.53 h1.8
  text "3" at -6.858,7.99 h1.8
  text "28" at 4.892,7.99 h1.8
  text "4" at -6.858,5.45 h1.8
  text "27" at 4.892,5.45 h1.8
  text "5" at -6.858,2.91 h1.8
  text "26" at 4.892,2.91 h1.8
  text "6" at -6.858,0.37 h1.8
  text "25" at 4.892,0.37 h1.8
  text "7" at -6.858,-2.17 h1.8
  text "24" at 4.892,-2.17 h1.8
  text "8" at -6.858,-4.71 h1.8
  text "23" at 4.892,-4.71 h1.8
  text "9" at -6.858,-7.25 h1.8
  text "22" at 4.892,-7.25 h1.8
  text "10" at -6.858,-9.79 h1.8
  text "21" at 4.892,-9.79 h1.8
  text "IP2040" at -1.03,-11.938 h4 r270
  text "11" at -6.858,-12.33 h1.8
  text "20" at 4.892,-12.33 h1.8
  text "12" at -6.858,-14.87 h1.8
  text "19" at 4.892,-14.87 h1.8
  text "13" at -6.858,-17.41 h1.8
  text "18" at 4.892,-17.41 h1.8
  text "14" at -6.858,-19.95 h1.8
  text "17" at 4.892,-19.95 h1.8
  text "15" at -6.858,-22.49 h1.8
  text "16" at 4.892,-22.49 h1.8
  text "SWD" at -2.716,-24.996 h1 r90
  text "SCLK" at 3.209,-24.992 h1 r90
  text "GND" at -6.858,-25.03 h1.2
  text "GND" at 4.892,-25.03 h1.2

## Text inside footprints (layer, text, board x,y; h text height)
D1: Bottom Assembly "1" at 5.475,13.825 h0.3
D2: Top Assembly "K" at 0.4,17.45 h0.5 r90
SW2: Top Assembly "1" at 1.748,17.998 h1 r270
SW3: Top Assembly "1" at -4.348,17.998 h1 r270
U1: Bottom Assembly "1" at 1.175,15.725 h0.3
U3: Bottom Assembly "1" at -4.3,4.995 h0.3 r180
U4: Bottom Assembly "1" at -0.975,-17.375 h0.3 r180
U6: Bottom Assembly "1" at 3.45,-8.595 h0.3